# EAGLE board barbuddy_SIngle (EAGLE 7.7.0)
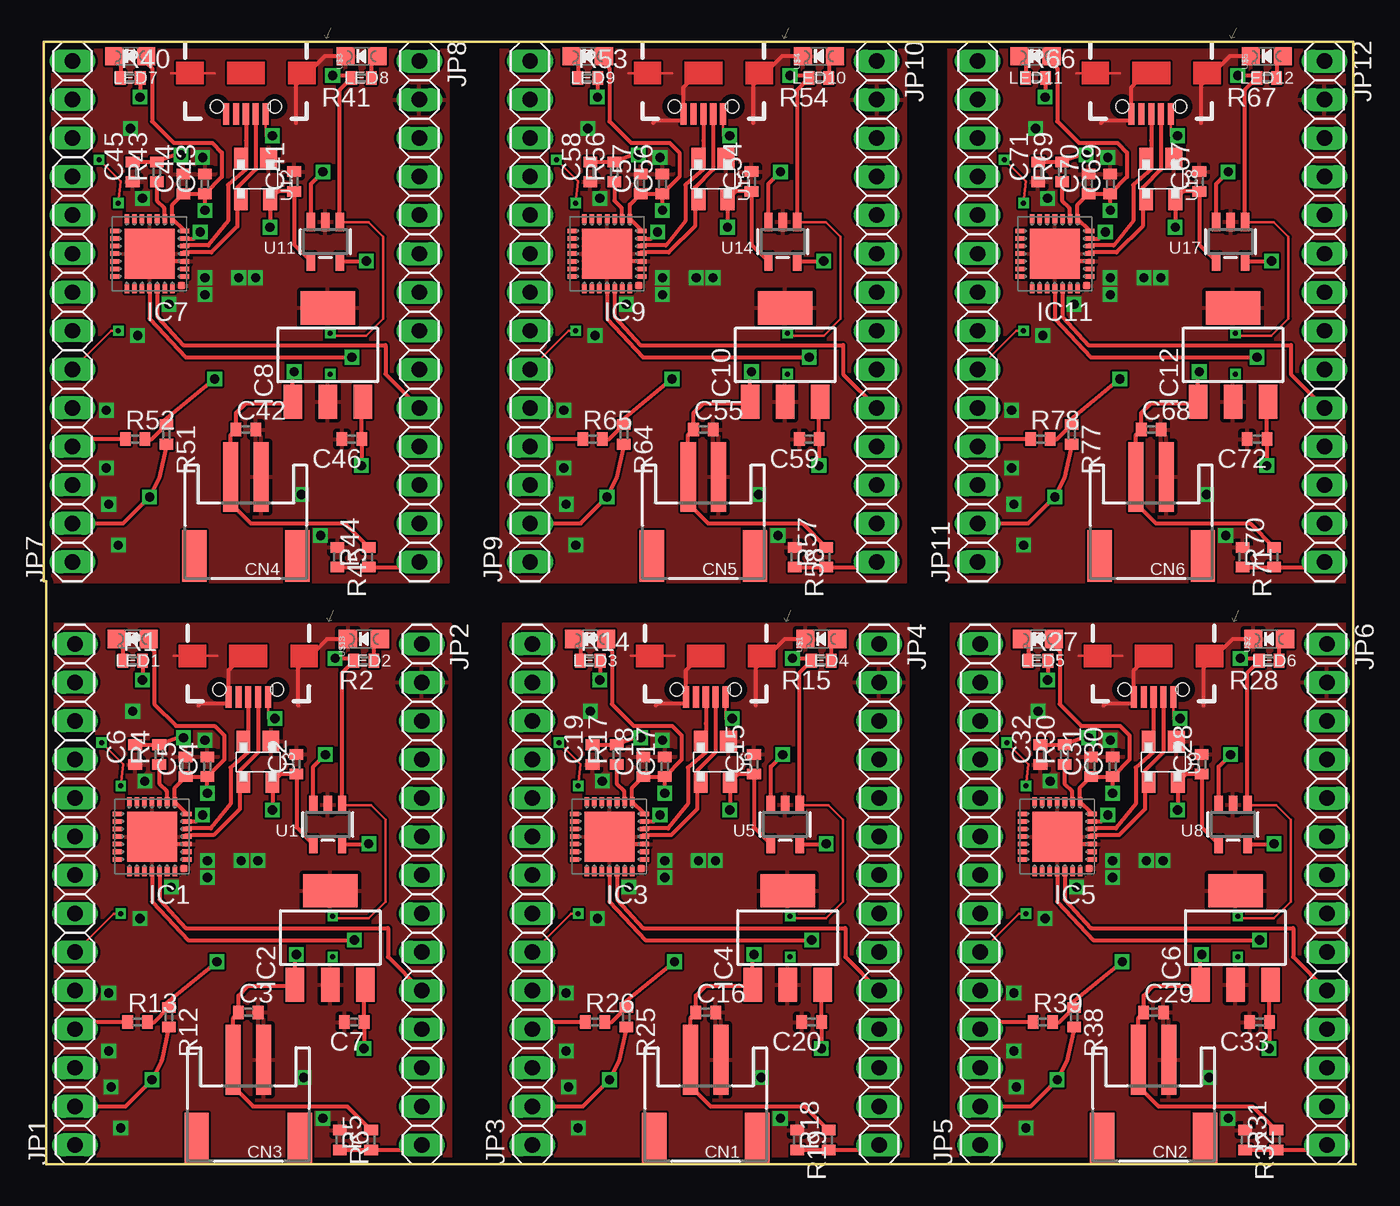
[diagram p0: board, top side]
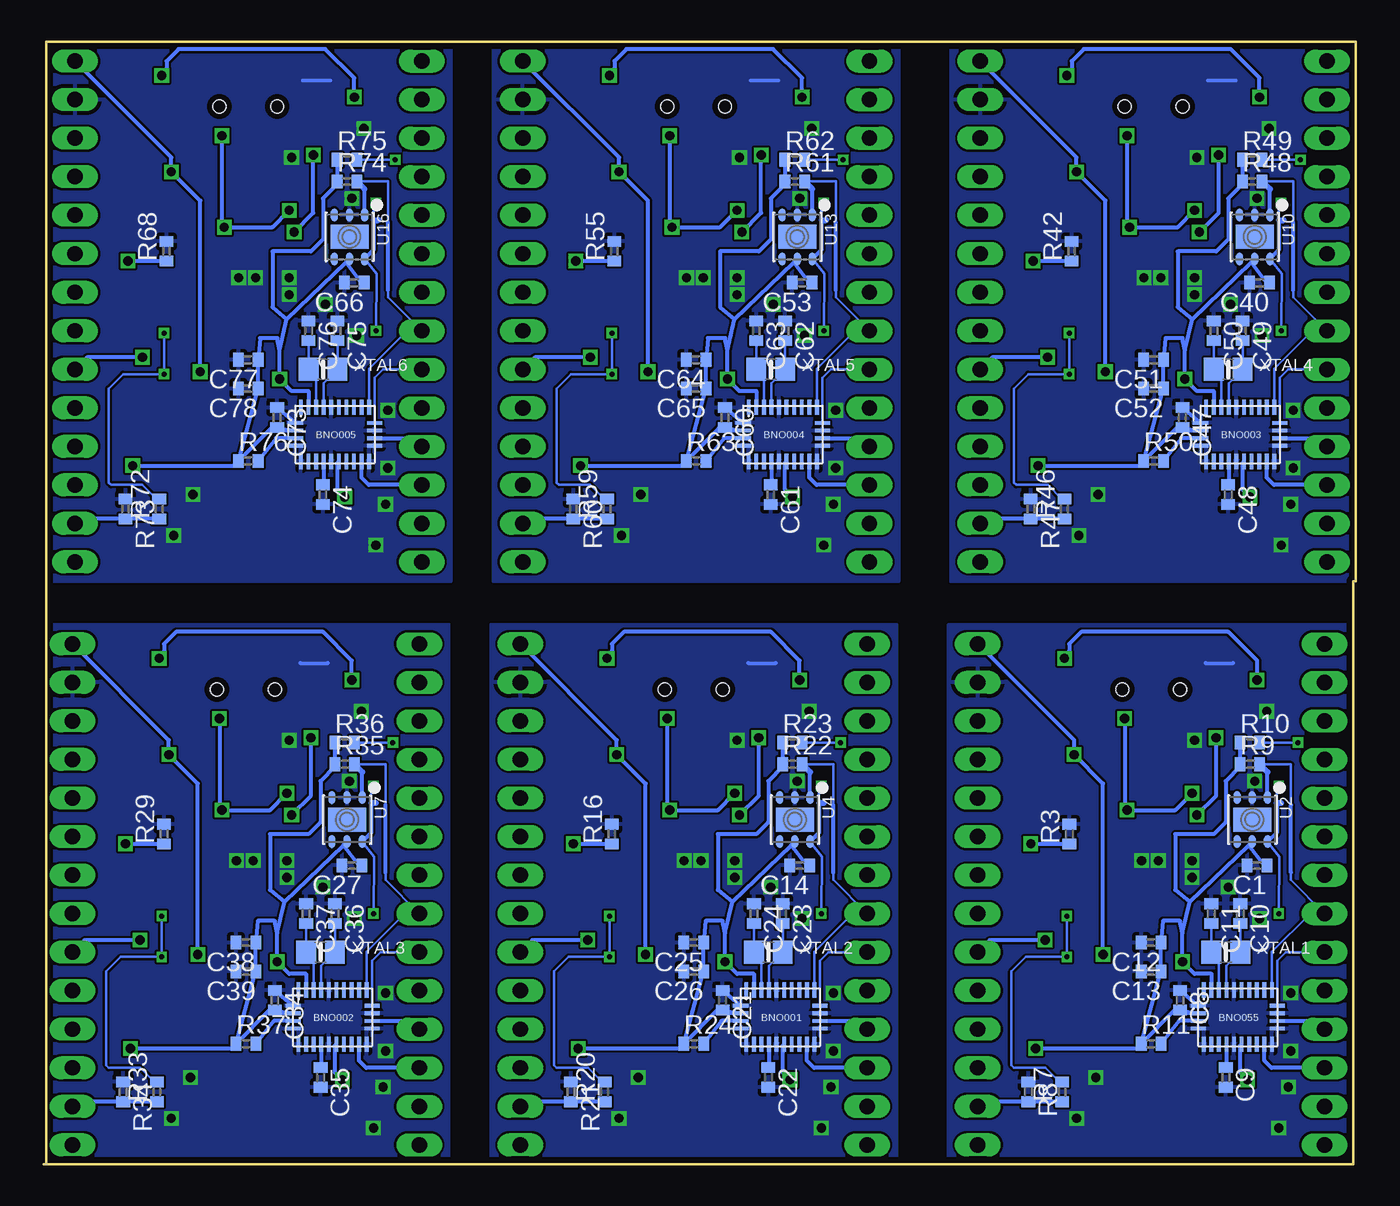
[diagram p1: board, bottom side, seen from below]

Size 86.52 x 73.98 mm. Coordinates in mm from the lower left corner, seen from the top.
Outline: 86.36,0 0.16,0 0.16,38.42 0,38.42 0,73.98 86.36,73.98 86.36,0
Outline: 86.52,0 86.36,0
Copper layers (1*16): Top 0.0356mm / dielectric 1.5011mm / Bottom 0.0356mm
Design rules "LaenPCBOrder": minimum track width 6mil, minimum drill 13mil, track to track 6mil, track to pad 6mil, pad to pad 6mil, via to via 6mil, smd to smd 6mil, copper to edge 15mil, drill to drill 6mil, minimum pad ring 7mil, minimum via ring 7mil, stop-mask expansion 3mil, vias tented up to drill 0mil, thermal gap 10mil

## Footprints (pad centres in the part's own frame; a part is rotated, then mirrored left to right if it is on the bottom)
LGA-28 = smd 0.25 x 1: P$1 -2.25,1.787; P$6 -2.25,-1.787; P$7 -1.75,-1.787; P$8 -1.25,-1.787; P$9 -0.75,-1.787; P$10 -0.25,-1.787; P$11 0.25,-1.787; P$12 0.75,-1.787; P$13 1.25,-1.787; P$14 1.75,-1.787; P$15 2.25,-1.787; P$20 2.25,1.787; P$21 1.75,1.787; P$22 1.25,1.787; P$23 0.75,1.787; P$24 0.25,1.787; P$25 -0.25,1.787; P$26 -0.75,1.787; P$27 -1.25,1.787; P$28 -1.75,1.787 | smd 1 x 0.25: P$2 -2.612,0.75; P$3 -2.612,0.25; P$4 -2.612,-0.25; P$5 -2.612,-0.75; P$16 2.612,-0.75; P$17 2.612,-0.25; P$18 2.612,0.25; P$19 2.612,0.75
C0402 = smd 0.7 x 0.9: 1 -0.65,0; 2 0.65,0
JSTPH2 = smd 1 x 4.6: 1 -1,-3.7; 2 1,-3.7 | smd 1.6 x 3.4: NC1 -3.4,1.5; NC2 3.4,1.5
MLP28 = smd 0.6 x 0.3: 1 -2.3,1.5; 2 -2.3,1; 3 -2.3,0.5; 4 -2.3,0; 5 -2.3,-0.5; 6 -2.3,-1; 7 -2.3,-1.5; 15 2.3,-1.5; 16 2.3,-1; 17 2.3,-0.5; 18 2.3,0; 19 2.3,0.5; 20 2.3,1; 21 2.3,1.5 | smd 0.3 x 0.6: 8 -1.5,-2.3; 9 -1,-2.3; 10 -0.5,-2.3; 11 0,-2.3; 12 0.5,-2.3; 13 1,-2.3; 14 1.5,-2.3; 22 1.5,2.3; 23 1,2.3; 24 0.5,2.3; 25 0,2.3; 26 -0.5,2.3; 27 -1,2.3; 28 -1.5,2.3 | smd 3.3 x 3.3: EXP 0,0 | smd 0.435 x 0.435: M -2.103,2.103
SOT223 = smd 1.219 x 2.235: 1 -2.311,-3.099; 2 0,-3.099; 3 2.311,-3.099 | smd 3.6 x 2.2: 4 0,3.099
1X14 = drill 1.016 long: 1 -16.51,0; 2 -13.97,0; 3 -11.43,0; 4 -8.89,0; 5 -6.35,0; 6 -3.81,0; 7 -1.27,0; 8 1.27,0; 9 3.81,0; 10 6.35,0; 11 8.89,0; 12 11.43,0; 13 13.97,0; 14 16.51,0
CHIPLED_0805_NOOUTLINE = smd 1.2 x 1.2: A 0,-1.05; C 0,1.05
R0402 = smd 0.7 x 0.9: 1 -0.65,0; 2 0.65,0
SOT23-5 = smd 0.55 x 1.2: 1 -0.95,-1.3; 2 0,-1.3; 3 0.95,-1.3; 4 0.95,1.3; 5 -0.95,1.3
DFN6_3X3_SI = smd 0.85 x 0.45: 1 -1.45,1; 2 -1.45,0; 3 -1.45,-1; 4 1.45,-1; 5 1.45,0; 6 1.45,1 | smd 1.6 x 2.5: P$1 0,0
SOT143 = smd 1.4 x 1.1: 1 -1.35,0.86 | smd 1.4 x 0.9: 2 -1.35,-0.96; 3 1.35,-0.96; 4 1.35,0.96
USB-AB-MICRO-SMD_V02_BOSS = smd 1.4 x 0.4: D+1 2.7,0; D-1 2.7,0.65; GND1 2.7,-1.3; ID1 2.7,-0.65; VBUS1 2.7,1.3 | hole 0.85: 2.2,1.9; 2.2,-1.9
0805-NO = smd 1.3 x 1.5: 1 -0.95,0; 2 0.95,0

## Placement (x,y rotation side)
BNO001  BNO055  [LGA-28]  37.94,9.68 0 bottom
BNO002  BNO055  [LGA-28]  67.47,9.68 0 bottom
BNO003  BNO055  [LGA-28]  7.62,48.1 0 bottom
BNO004  BNO055  [LGA-28]  37.78,48.1 0 bottom
BNO005  BNO055  [LGA-28]  67.31,48.1 0 bottom
BNO055  BNO055  [LGA-28]  7.78,9.68 0 bottom
C1  0.1uF  [C0402]  6.51,19.68 180 bottom
C2  10µF  [C0402]  16.67,26.35 90 top
C3  10µF  [C0402]  13.49,10 0 top
C4  1µF  [C0402]  10.79,26.19 90 top
C5  .1µF  [C0402]  9.37,26.19 90 top
C6  .1µF  [C0402]  6.03,26.99 90 top
C7  3.3uf  [C0402]  20.48,9.37 180 top
C8  0.1uF  [C0402]  11.59,10.79 270 bottom
C9  0.1uF  [C0402]  8.57,5.71 270 bottom
C10  22pf  [C0402]  7.62,16.51 270 bottom
C11  22pf  [C0402]  9.53,16.51 270 bottom
C12  6.8nf  [C0402]  13.49,14.61 180 bottom
C13  120nf  [C0402]  13.49,12.7 180 bottom
C14  0.1uF  [C0402]  36.67,19.68 180 bottom
C15  10µF  [C0402]  46.83,26.35 90 top
C16  10µF  [C0402]  43.66,10 0 top
C17  1µF  [C0402]  40.96,26.19 90 top
C18  .1µF  [C0402]  39.53,26.19 90 top
C19  .1µF  [C0402]  36.2,26.99 90 top
C20  3.3uf  [C0402]  50.64,9.37 180 top
C21  0.1uF  [C0402]  41.75,10.79 270 bottom
C22  0.1uF  [C0402]  38.73,5.71 270 bottom
C23  22pf  [C0402]  37.78,16.51 270 bottom
C24  22pf  [C0402]  39.69,16.51 270 bottom
C25  6.8nf  [C0402]  43.66,14.61 180 bottom
C26  120nf  [C0402]  43.66,12.7 180 bottom
C27  0.1uF  [C0402]  66.2,19.68 180 bottom
C28  10µF  [C0402]  76.36,26.35 90 top
C29  10µF  [C0402]  73.18,10 0 top
C30  1µF  [C0402]  70.48,26.19 90 top
C31  .1µF  [C0402]  69.06,26.19 90 top
C32  .1µF  [C0402]  65.72,26.99 90 top
C33  3.3uf  [C0402]  80.17,9.37 180 top
C34  0.1uF  [C0402]  71.28,10.79 270 bottom
C35  0.1uF  [C0402]  68.26,5.71 270 bottom
C36  22pf  [C0402]  67.31,16.51 270 bottom
C37  22pf  [C0402]  69.22,16.51 270 bottom
C38  6.8nf  [C0402]  73.18,14.61 180 bottom
C39  120nf  [C0402]  73.18,12.7 180 bottom
C40  0.1uF  [C0402]  6.35,58.1 180 bottom
C41  10µF  [C0402]  16.51,64.77 90 top
C42  10µF  [C0402]  13.33,48.42 0 top
C43  1µF  [C0402]  10.64,64.61 90 top
C44  .1µF  [C0402]  9.21,64.61 90 top
C45  .1µF  [C0402]  5.87,65.41 90 top
C46  3.3uf  [C0402]  20.32,47.78 180 top
C47  0.1uF  [C0402]  11.43,49.21 270 bottom
C48  0.1uF  [C0402]  8.41,44.13 270 bottom
C49  22pf  [C0402]  7.46,54.93 270 bottom
C50  22pf  [C0402]  9.37,54.93 270 bottom
C51  6.8nf  [C0402]  13.33,53.02 180 bottom
C52  120nf  [C0402]  13.33,51.12 180 bottom
C53  0.1uF  [C0402]  36.51,58.1 180 bottom
C54  10µF  [C0402]  46.67,64.77 90 top
C55  10µF  [C0402]  43.5,48.42 0 top
C56  1µF  [C0402]  40.8,64.61 90 top
C57  .1µF  [C0402]  39.37,64.61 90 top
C58  .1µF  [C0402]  36.04,65.41 90 top
C59  3.3uf  [C0402]  50.48,47.78 180 top
C60  0.1uF  [C0402]  41.59,49.21 270 bottom
C61  0.1uF  [C0402]  38.58,44.13 270 bottom
C62  22pf  [C0402]  37.62,54.93 270 bottom
C63  22pf  [C0402]  39.53,54.93 270 bottom
C64  6.8nf  [C0402]  43.5,53.02 180 bottom
C65  120nf  [C0402]  43.5,51.12 180 bottom
C66  0.1uF  [C0402]  66.04,58.1 180 bottom
C67  10µF  [C0402]  76.2,64.77 90 top
C68  10µF  [C0402]  73.02,48.42 0 top
C69  1µF  [C0402]  70.33,64.61 90 top
C70  .1µF  [C0402]  68.9,64.61 90 top
C71  .1µF  [C0402]  65.56,65.41 90 top
C72  3.3uf  [C0402]  80.01,47.78 180 top
C73  0.1uF  [C0402]  71.12,49.21 270 bottom
C74  0.1uF  [C0402]  68.1,44.13 270 bottom
C75  22pf  [C0402]  67.15,54.93 270 bottom
C76  22pf  [C0402]  69.06,54.93 270 bottom
C77  6.8nf  [C0402]  73.02,53.02 180 bottom
C78  120nf  [C0402]  73.02,51.12 180 bottom
CN1  JSTPH  [JSTPH2]  43.66,3.17 180 top
CN2  JSTPH  [JSTPH2]  73.18,3.17 180 top
CN3  JSTPH  [JSTPH2]  13.49,3.17 180 top
CN4  JSTPH  [JSTPH2]  13.33,41.59 180 top
CN5  JSTPH  [JSTPH2]  43.5,41.59 180 top
CN6  JSTPH  [JSTPH2]  73.02,41.59 180 top
IC1  CP2102  [MLP28]  7.14,21.59 180 top
IC2  [SOT223]  18.89,14.92 0 top
IC3  CP2102  [MLP28]  37.31,21.59 180 top
IC4  [SOT223]  49.05,14.92 0 top
IC5  CP2102  [MLP28]  66.83,21.59 180 top
IC6  [SOT223]  78.58,14.92 0 top
IC7  CP2102  [MLP28]  6.99,60.01 180 top
IC8  [SOT223]  18.73,53.34 0 top
IC9  CP2102  [MLP28]  37.15,60.01 180 top
IC10  [SOT223]  48.89,53.34 0 top
IC11  CP2102  [MLP28]  66.67,60.01 180 top
IC12  [SOT223]  78.42,53.34 0 top
JP1  [1X14]  2.06,17.78 90 top
JP2  [1X14]  24.92,17.78 270 top
JP3  [1X14]  32.23,17.78 90 top
JP4  [1X14]  55.09,17.78 270 top
JP5  [1X14]  61.75,17.78 90 top
JP6  [1X14]  84.61,17.78 270 top
JP7  [1X14]  1.91,56.2 90 top
JP8  [1X14]  24.77,56.2 270 top
JP9  [1X14]  32.07,56.2 90 top
JP10  [1X14]  54.93,56.2 270 top
JP11  [1X14]  61.59,56.2 90 top
JP12  [1X14]  84.45,56.2 270 top
LED1  RED  [CHIPLED_0805_NOOUTLINE]  5.87,34.61 90 top
LED2  GREEN  [CHIPLED_0805_NOOUTLINE]  21.11,34.61 90 top
LED3  RED  [CHIPLED_0805_NOOUTLINE]  36.04,34.61 90 top
LED4  GREEN  [CHIPLED_0805_NOOUTLINE]  51.28,34.61 90 top
LED5  RED  [CHIPLED_0805_NOOUTLINE]  65.56,34.61 90 top
LED6  GREEN  [CHIPLED_0805_NOOUTLINE]  80.8,34.61 90 top
LED7  RED  [CHIPLED_0805_NOOUTLINE]  5.72,73.03 90 top
LED8  GREEN  [CHIPLED_0805_NOOUTLINE]  20.96,73.03 90 top
LED9  RED  [CHIPLED_0805_NOOUTLINE]  35.88,73.03 90 top
LED10  GREEN  [CHIPLED_0805_NOOUTLINE]  51.12,73.03 90 top
LED11  RED  [CHIPLED_0805_NOOUTLINE]  65.41,73.03 90 top
LED12  GREEN  [CHIPLED_0805_NOOUTLINE]  80.64,73.03 90 top
R1  470  [R0402]  5.87,33.18 0 top
R2  470  [R0402]  21.11,33.18 180 top
R3  5K\  [R0402]  18.89,21.75 90 bottom
R4  4.7k  [R0402]  7.62,26.99 90 top
R5  33k  [R0402]  21.59,1.59 90 top
R6  100k  [R0402]  19.53,1.59 270 top
R7  33k  [R0402]  19.37,4.76 90 bottom
R8  100k  [R0402]  21.59,4.76 270 bottom
R9  10k  [R0402]  6.99,26.35 0 bottom
R10  10k  [R0402]  6.99,27.78 0 bottom
R11  10k  [R0402]  13.49,7.94 0 bottom
R12  10k  [R0402]  8.25,9.68 270 top
R13  10k  [R0402]  6.19,9.37 0 top
R14  470  [R0402]  36.04,33.18 0 top
R15  470  [R0402]  51.28,33.18 180 top
R16  5K\  [R0402]  49.05,21.75 90 bottom
R17  4.7k  [R0402]  37.78,26.99 90 top
R18  33k  [R0402]  51.75,1.59 90 top
R19  100k  [R0402]  49.69,1.59 270 top
R20  33k  [R0402]  49.53,4.76 90 bottom
R21  100k  [R0402]  51.75,4.76 270 bottom
R22  10k  [R0402]  37.15,26.35 0 bottom
R23  10k  [R0402]  37.15,27.78 0 bottom
R24  10k  [R0402]  43.66,7.94 0 bottom
R25  10k  [R0402]  38.42,9.68 270 top
R26  10k  [R0402]  36.35,9.37 0 top
R27  470  [R0402]  65.56,33.18 0 top
R28  470  [R0402]  80.8,33.18 180 top
R29  5K\  [R0402]  78.58,21.75 90 bottom
R30  4.7k  [R0402]  67.31,26.99 90 top
R31  33k  [R0402]  81.28,1.59 90 top
R32  100k  [R0402]  79.22,1.59 270 top
R33  33k  [R0402]  79.06,4.76 90 bottom
R34  100k  [R0402]  81.28,4.76 270 bottom
R35  10k  [R0402]  66.67,26.35 0 bottom
R36  10k  [R0402]  66.67,27.78 0 bottom
R37  10k  [R0402]  73.18,7.94 0 bottom
R38  10k  [R0402]  67.94,9.68 270 top
R39  10k  [R0402]  65.88,9.37 0 top
R40  470  [R0402]  5.72,71.6 0 top
R41  470  [R0402]  20.96,71.6 180 top
R42  5K\  [R0402]  18.73,60.17 90 bottom
R43  4.7k  [R0402]  7.46,65.41 90 top
R44  33k  [R0402]  21.43,40.01 90 top
R45  100k  [R0402]  19.37,40.01 270 top
R46  33k  [R0402]  19.21,43.18 90 bottom
R47  100k  [R0402]  21.43,43.18 270 bottom
R48  10k  [R0402]  6.83,64.77 0 bottom
R49  10k  [R0402]  6.83,66.2 0 bottom
R50  10k  [R0402]  13.33,46.35 0 bottom
R51  10k  [R0402]  8.1,48.1 270 top
R52  10k  [R0402]  6.03,47.78 0 top
R53  470  [R0402]  35.88,71.6 0 top
R54  470  [R0402]  51.12,71.6 180 top
R55  5K\  [R0402]  48.89,60.17 90 bottom
R56  4.7k  [R0402]  37.62,65.41 90 top
R57  33k  [R0402]  51.59,40.01 90 top
R58  100k  [R0402]  49.53,40.01 270 top
R59  33k  [R0402]  49.37,43.18 90 bottom
R60  100k  [R0402]  51.59,43.18 270 bottom
R61  10k  [R0402]  36.99,64.77 0 bottom
R62  10k  [R0402]  36.99,66.2 0 bottom
R63  10k  [R0402]  43.5,46.35 0 bottom
R64  10k  [R0402]  38.26,48.1 270 top
R65  10k  [R0402]  36.2,47.78 0 top
R66  470  [R0402]  65.41,71.6 0 top
R67  470  [R0402]  80.64,71.6 180 top
R68  5K\  [R0402]  78.42,60.17 90 bottom
R69  4.7k  [R0402]  67.15,65.41 90 top
R70  33k  [R0402]  81.12,40.01 90 top
R71  100k  [R0402]  79.06,40.01 270 top
R72  33k  [R0402]  78.9,43.18 90 bottom
R73  100k  [R0402]  81.12,43.18 270 bottom
R74  10k  [R0402]  66.52,64.77 0 bottom
R75  10k  [R0402]  66.52,66.2 0 bottom
R76  10k  [R0402]  73.02,46.35 0 bottom
R77  10k  [R0402]  67.79,48.1 270 top
R78  10k  [R0402]  65.72,47.78 0 top
U1  MCP73831T-2ACI/OT  [SOT23-5]  18.73,22.38 180 top
U2  Si7021-A20  [DFN6_3X3_SI]  6.83,22.7 270 bottom
U3  SP0503BAHTG  [SOT143]  14.13,26.51 270 top
U4  Si7021-A20  [DFN6_3X3_SI]  36.99,22.7 270 bottom
U5  MCP73831T-2ACI/OT  [SOT23-5]  48.89,22.38 180 top
U6  SP0503BAHTG  [SOT143]  44.29,26.51 270 top
U7  Si7021-A20  [DFN6_3X3_SI]  66.52,22.7 270 bottom
U8  MCP73831T-2ACI/OT  [SOT23-5]  78.42,22.38 180 top
U9  SP0503BAHTG  [SOT143]  73.82,26.51 270 top
U10  Si7021-A20  [DFN6_3X3_SI]  6.67,61.12 270 bottom
U11  MCP73831T-2ACI/OT  [SOT23-5]  18.57,60.8 180 top
U12  SP0503BAHTG  [SOT143]  13.97,64.93 270 top
U13  Si7021-A20  [DFN6_3X3_SI]  36.83,61.12 270 bottom
U14  MCP73831T-2ACI/OT  [SOT23-5]  48.74,60.8 180 top
U15  SP0503BAHTG  [SOT143]  44.13,64.93 270 top
U16  Si7021-A20  [DFN6_3X3_SI]  66.36,61.12 270 bottom
U17  MCP73831T-2ACI/OT  [SOT23-5]  78.26,60.8 180 top
U18  SP0503BAHTG  [SOT143]  73.66,64.93 270 top
U$1  [USB-AB-MICRO-SMD_V02_BOSS]  43.66,33.5 270 top
U$2  [USB-AB-MICRO-SMD_V02_BOSS]  73.18,33.5 270 top
U$3  [USB-AB-MICRO-SMD_V02_BOSS]  13.33,71.91 270 top
U$4  [USB-AB-MICRO-SMD_V02_BOSS]  43.5,71.91 270 top
U$5  [USB-AB-MICRO-SMD_V02_BOSS]  73.02,71.91 270 top
U$13  [USB-AB-MICRO-SMD_V02_BOSS]  13.49,33.5 270 top
XTAL1  10k  [0805-NO]  8.57,13.97 0 bottom
XTAL2  10k  [0805-NO]  38.73,13.97 0 bottom
XTAL3  10k  [0805-NO]  68.26,13.97 0 bottom
XTAL4  10k  [0805-NO]  8.41,52.39 0 bottom
XTAL5  10k  [0805-NO]  38.58,52.39 0 bottom
XTAL6  10k  [0805-NO]  68.1,52.39 0 bottom

## Library data of the parts
BNO001-BNO005 BNO055 = BNO055
C1-C78 R1-R78 = rcl
CN1-CN6 LED1-LED12 U1 U2 U4 U5 U7 U8 U10 U11 U13 U14 U16 U17 XTAL1-XTAL6 = microbuilder
IC1 IC3 IC5 IC7 IC9 IC11 = silabs; MF: FARNELL; MPN: CP2102-GM; OC_FARNELL: 9282130; OC_NEWARK: 30K5635
IC2 IC4 IC6 IC8 IC10 IC12 = linear-technology
JP1-JP12 = pinhead
U3 U6 U9 U12 U15 U18 = littlefuse
U$1-U$5 U$13 = Testing

## Nets
BATT_SENSE: JP2.14 R5.1 R6.2
BATT_SENSE1: JP4.14 R18.1 R19.2
BATT_SENSE2: JP6.14 R31.1 R32.2
BATT_SENSE3: JP8.14 R44.1 R45.2
BATT_SENSE4: JP10.14 R57.1 R58.2
BATT_SENSE5: JP12.14 R70.1 R71.2
BNO_CAP: BNO055.P$9 C9.1
BNO_CAP1: BNO001.P$9 C22.1
BNO_CAP2: BNO002.P$9 C35.1
BNO_CAP3: BNO003.P$9 C48.1
BNO_CAP4: BNO004.P$9 C61.1
BNO_CAP5: BNO005.P$9 C74.1
BNO_INT: BNO055.P$14 JP1.3
BNO_INT1: BNO001.P$14 JP3.3
BNO_INT2: BNO002.P$14 JP5.3
BNO_INT3: BNO003.P$14 JP7.3
BNO_INT4: BNO004.P$14 JP9.3
BNO_INT5: BNO005.P$14 JP11.3
BNO_RST: BNO055.P$11 JP1.2 R12.2
BNO_RST1: BNO001.P$11 JP3.2 R25.2
BNO_RST2: BNO002.P$11 JP5.2 R38.2
BNO_RST3: BNO003.P$11 JP7.2 R51.2
BNO_RST4: BNO004.P$11 JP9.2 R64.2
BNO_RST5: BNO005.P$11 JP11.2 R77.2
CHG_PROG: R3.1 U1.5
CHG_PROG1: R16.1 U5.5
CHG_PROG2: R29.1 U8.5
CHG_PROG3: R42.1 U11.5
CHG_PROG4: R55.1 U14.5
CHG_PROG5: R68.1 U17.5
CHG_SENSE: JP2.13 R7.1 R8.2
CHG_SENSE1: JP4.13 R20.1 R21.2
CHG_SENSE2: JP6.13 R33.1 R34.2
CHG_SENSE3: JP8.13 R46.1 R47.2
CHG_SENSE4: JP10.13 R59.1 R60.2
CHG_SENSE5: JP12.13 R72.1 R73.2
CHG_STATUS: R1.2 R2.2 R7.2 U1.1
CHG_STATUS1: R14.2 R15.2 R20.2 U5.1
CHG_STATUS2: R27.2 R28.2 R33.2 U8.1
CHG_STATUS3: R40.2 R41.2 R46.2 U11.1
CHG_STATUS4: R53.2 R54.2 R59.2 U14.1
CHG_STATUS5: R66.2 R67.2 R72.2 U17.1
CP2102_RST: IC1.9 R4.1
CP2102_RST1: IC3.9 R17.1
CP2102_RST2: IC5.9 R30.1
CP2102_RST3: IC7.9 R43.1
CP2102_RST4: IC9.9 R56.1
CP2102_RST5: IC11.9 R69.1
D+: U$13.D+1
D+1: U$1.D+1
D+2: U$2.D+1
D+3: U$3.D+1
D+4: U$4.D+1
D+5: U$5.D+1
D-: U$13.D-1
D-1: U$1.D-1
D-2: U$2.D-1
D-3: U$3.D-1
D-4: U$4.D-1
D-5: U$5.D-1
GND: BNO055.P$2 BNO055.P$5 BNO055.P$6 BNO055.P$10 BNO055.P$15 BNO055.P$16 BNO055.P$18 BNO055.P$25 C1.2 C2.2 C3.2 C4.2 C5.2 C6.1 C7.2 C8.1 C9.2 C10.1 C11.1 C12.2 C13.2 CN3.1 IC1.3 IC1.EXP IC1.M IC2.2 IC2.4 JP2.2 LED2.C R3.2 R6.1 R8.1 U1.2 U2.2 U3.1
GND1: U$13.GND1
GND2: BNO001.P$2 BNO001.P$5 BNO001.P$6 BNO001.P$10 BNO001.P$15 BNO001.P$16 BNO001.P$18 BNO001.P$25 C14.2 C15.2 C16.2 C17.2 C18.2 C19.1 C20.2 C21.1 C22.2 C23.1 C24.1 C25.2 C26.2 CN1.1 IC3.3 IC3.EXP IC3.M IC4.2 IC4.4 JP4.2 LED4.C R16.2 R19.1 R21.1 U4.2 U5.2 U6.1
GND3: U$1.GND1
GND4: BNO002.P$2 BNO002.P$5 BNO002.P$6 BNO002.P$10 BNO002.P$15 BNO002.P$16 BNO002.P$18 BNO002.P$25 C27.2 C28.2 C29.2 C30.2 C31.2 C32.1 C33.2 C34.1 C35.2 C36.1 C37.1 C38.2 C39.2 CN2.1 IC5.3 IC5.EXP IC5.M IC6.2 IC6.4 JP6.2 LED6.C R29.2 R32.1 R34.1 U7.2 U8.2 U9.1
GND5: U$2.GND1
GND6: BNO003.P$2 BNO003.P$5 BNO003.P$6 BNO003.P$10 BNO003.P$15 BNO003.P$16 BNO003.P$18 BNO003.P$25 C40.2 C41.2 C42.2 C43.2 C44.2 C45.1 C46.2 C47.1 C48.2 C49.1 C50.1 C51.2 C52.2 CN4.1 IC7.3 IC7.EXP IC7.M IC8.2 IC8.4 JP8.2 LED8.C R42.2 R45.1 R47.1 U10.2 U11.2 U12.1
GND7: U$3.GND1
GND8: BNO004.P$2 BNO004.P$5 BNO004.P$6 BNO004.P$10 BNO004.P$15 BNO004.P$16 BNO004.P$18 BNO004.P$25 C53.2 C54.2 C55.2 C56.2 C57.2 C58.1 C59.2 C60.1 C61.2 C62.1 C63.1 C64.2 C65.2 CN5.1 IC9.3 IC9.EXP IC9.M IC10.2 IC10.4 JP10.2 LED10.C R55.2 R58.1 R60.1 U13.2 U14.2 U15.1
GND9: U$4.GND1
GND10: BNO005.P$2 BNO005.P$5 BNO005.P$6 BNO005.P$10 BNO005.P$15 BNO005.P$16 BNO005.P$18 BNO005.P$25 C66.2 C67.2 C68.2 C69.2 C70.2 C71.1 C72.2 C73.1 C74.2 C75.1 C76.1 C77.2 C78.2 CN6.1 IC11.3 IC11.EXP IC11.M IC12.2 IC12.4 JP12.2 LED12.C R68.2 R71.1 R73.1 U16.2 U17.2 U18.1
GND11: U$5.GND1
I2C_ADDR_SEL: BNO055.P$17 JP1.4 R13.1
I2C_ADDR_SEL1: BNO001.P$17 JP3.4 R26.1
I2C_ADDR_SEL2: BNO002.P$17 JP5.4 R39.1
I2C_ADDR_SEL3: BNO003.P$17 JP7.4 R52.1
I2C_ADDR_SEL4: BNO004.P$17 JP9.4 R65.1
I2C_ADDR_SEL5: BNO005.P$17 JP11.4 R78.1
I2C_SCL: BNO055.P$19 JP1.6 R10.2 U2.6
I2C_SCL1: BNO001.P$19 JP3.6 R23.2 U4.6
I2C_SCL2: BNO002.P$19 JP5.6 R36.2 U7.6
I2C_SCL3: BNO003.P$19 JP7.6 R49.2 U10.6
I2C_SCL4: BNO004.P$19 JP9.6 R62.2 U13.6
I2C_SCL5: BNO005.P$19 JP11.6 R75.2 U16.6
I2C_SDA: BNO055.P$20 JP1.7 R9.2 U2.1
I2C_SDA1: BNO001.P$20 JP3.7 R22.2 U4.1
I2C_SDA2: BNO002.P$20 JP5.7 R35.2 U7.1
I2C_SDA3: BNO003.P$20 JP7.7 R48.2 U10.1
I2C_SDA4: BNO004.P$20 JP9.7 R61.2 U13.1
I2C_SDA5: BNO005.P$20 JP11.7 R74.2 U16.1
ID: U$13.ID1
ID1: U$1.ID1
ID2: U$2.ID1
ID3: U$3.ID1
ID4: U$4.ID1
ID5: U$5.ID1
N$1: LED1.C R1.1
N$2: LED3.C R14.1
N$3: BNO055.P$4 R11.2
N$4: LED4.A R15.1
N$5: BNO001.P$4 R24.2
N$6: LED2.A R2.1
N$7: LED5.C R27.1
N$8: LED6.A R28.1
N$9: BNO002.P$4 R37.2
N$10: LED7.C R40.1
N$11: LED8.A R41.1
N$12: BNO003.P$4 R50.2
N$13: LED9.C R53.1
N$14: LED10.A R54.1
N$15: BNO004.P$4 R63.2
N$16: LED11.C R66.1
N$17: LED12.A R67.1
N$18: BNO005.P$4 R76.2
UART0_RX: IC1.26 JP2.10
UART0_RX1: IC3.26 JP4.10
UART0_RX2: IC5.26 JP6.10
UART0_RX3: IC7.26 JP8.10
UART0_RX4: IC9.26 JP10.10
UART0_RX5: IC11.26 JP12.10
UART0_TX: IC1.25 JP2.9
UART0_TX1: IC3.25 JP4.9
UART0_TX2: IC5.25 JP6.9
UART0_TX3: IC7.25 JP8.9
UART0_TX4: IC9.25 JP10.9
UART0_TX5: IC11.25 JP12.9
USB_N: IC1.4 U3.3
USB_N1: IC3.4 U6.3
USB_N2: IC5.4 U9.3
USB_N3: IC7.4 U12.3
USB_N4: IC9.4 U15.3
USB_N5: IC11.4 U18.3
USB_P: IC1.5 U3.2
USB_P1: IC3.5 U6.2
USB_P2: IC5.5 U9.2
USB_P3: IC7.5 U12.2
USB_P4: IC9.5 U15.2
USB_P5: IC11.5 U18.2
VBAT1: C3.1 CN3.2 IC2.1 JP2.1 R5.2 U1.3
VBAT2: C16.1 CN1.2 IC4.1 JP4.1 R18.2 U5.3
VBAT3: C29.1 CN2.2 IC6.1 JP6.1 R31.2 U8.3
VBAT4: C42.1 CN4.2 IC8.1 JP8.1 R44.2 U11.3
VBAT5: C55.1 CN5.2 IC10.1 JP10.1 R57.2 U14.3
VBAT6: C68.1 CN6.2 IC12.1 JP12.1 R70.2 U17.3
VDD_3V1: BNO001.P$3 BNO001.P$28 C14.1 C20.1 C21.2 C25.1 C26.1 IC4.3 R22.1 R23.1 R24.1 R25.1 R26.2 U4.5
VDD_3V2: BNO002.P$3 BNO002.P$28 C27.1 C33.1 C34.2 C38.1 C39.1 IC6.3 R35.1 R36.1 R37.1 R38.1 R39.2 U7.5
VDD_3V3: BNO055.P$3 BNO055.P$28 C1.1 C7.1 C8.2 C12.1 C13.1 IC2.3 R9.1 R10.1 R11.1 R12.1 R13.2 U2.5
VDD_3V4: BNO003.P$3 BNO003.P$28 C40.1 C46.1 C47.2 C51.1 C52.1 IC8.3 R48.1 R49.1 R50.1 R51.1 R52.2 U10.5
VDD_3V5: BNO004.P$3 BNO004.P$28 C53.1 C59.1 C60.2 C64.1 C65.1 IC10.3 R61.1 R62.1 R63.1 R64.1 R65.2 U13.5
VDD_3V6: BNO005.P$3 BNO005.P$28 C66.1 C72.1 C73.2 C77.1 C78.1 IC12.3 R74.1 R75.1 R76.1 R77.1 R78.2 U16.5
VDD_CP1: C19.2 IC3.6 R17.2
VDD_CP2: C32.2 IC5.6 R30.2
VDD_CP3: C45.2 IC7.6 R43.2
VDD_CP4: C58.2 IC9.6 R56.2
VDD_CP5: C71.2 IC11.6 R69.2
VDD_CP2102: C6.2 IC1.6 R4.2
VDD_USB: C2.1 C4.1 C5.1 IC1.7 IC1.8 LED1.A U1.4 U3.4 U$13.VBUS1
VDD_USB1: C15.1 C17.1 C18.1 IC3.7 IC3.8 LED3.A U5.4 U6.4 U$1.VBUS1
VDD_USB2: C28.1 C30.1 C31.1 IC5.7 IC5.8 LED5.A U8.4 U9.4 U$2.VBUS1
VDD_USB3: C41.1 C43.1 C44.1 IC7.7 IC7.8 LED7.A U11.4 U12.4 U$3.VBUS1
VDD_USB4: C54.1 C56.1 C57.1 IC9.7 IC9.8 LED9.A U14.4 U15.4 U$4.VBUS1
VDD_USB5: C67.1 C69.1 C70.1 IC11.7 IC11.8 LED11.A U17.4 U18.4 U$5.VBUS1
X_IN: BNO055.P$27 C11.2 XTAL1.1
X_IN1: BNO001.P$27 C24.2 XTAL2.1
X_IN2: BNO002.P$27 C37.2 XTAL3.1
X_IN3: BNO003.P$27 C50.2 XTAL4.1
X_IN4: BNO004.P$27 C63.2 XTAL5.1
X_IN5: BNO005.P$27 C76.2 XTAL6.1
X_OUT: BNO055.P$26 C10.2 XTAL1.2
X_OUT1: BNO001.P$26 C23.2 XTAL2.2
X_OUT2: BNO002.P$26 C36.2 XTAL3.2
X_OUT3: BNO003.P$26 C49.2 XTAL4.2
X_OUT4: BNO004.P$26 C62.2 XTAL5.2
X_OUT5: BNO005.P$26 C75.2 XTAL6.2

## Tracks (layer width: path | path; a pad name or v marks a point on that pad's centre or on a via)
BATT_SENSE
  Top 0.254: R6.2 R5.1 24.59,0.94 JP2.14
BATT_SENSE1
  Top 0.254: R19.2 R18.1 54.75,0.94 JP4.14
BATT_SENSE2
  Top 0.254: R32.2 R31.1 84.28,0.94 JP6.14
BATT_SENSE3
  Top 0.254: R45.2 R44.1 24.43,39.35 JP8.14
BATT_SENSE4
  Top 0.254: R58.2 R57.1 54.59,39.35 JP10.14
BATT_SENSE5
  Top 0.254: R71.2 R70.1 84.12,39.35 JP12.14
BNO_CAP
  Bottom 0.254: BNO055.P$9 8.53,6.41 C9.1
BNO_CAP1
  Bottom 0.254: BNO001.P$9 38.69,6.41 C22.1
BNO_CAP2
  Bottom 0.254: BNO002.P$9 68.22,6.41 C35.1
BNO_CAP3
  Bottom 0.254: BNO003.P$9 8.37,44.83 C48.1
BNO_CAP4
  Bottom 0.254: BNO004.P$9 38.53,44.83 C61.1
BNO_CAP5
  Bottom 0.254: BNO005.P$9 68.06,44.83 C74.1
BNO_INT
  Bottom 0.254: JP1.3 5.56,6.35 6.03,6.83 BNO055.P$14
BNO_INT1
  Bottom 0.254: JP3.3 35.72,6.35 36.19,6.83 BNO001.P$14
BNO_INT2
  Bottom 0.254: JP5.3 65.25,6.35 65.72,6.83 BNO002.P$14
BNO_INT3
  Bottom 0.254: JP7.3 5.4,44.77 5.87,45.24 BNO003.P$14
BNO_INT4
  Bottom 0.254: JP9.3 35.56,44.77 36.04,45.24 BNO004.P$14
BNO_INT5
  Bottom 0.254: JP11.3 65.09,44.77 65.56,45.24 BNO005.P$14
BNO_RST  (via drill 0.61)
  Top 0.254: R12.2 7.78,6.83 v7.14,5.56 5.4,3.81 JP1.2
  Bottom 0.254: v7.14,5.56 7.62,6.03 7.62,7.81 BNO055.P$11
BNO_RST1  (via drill 0.61)
  Top 0.254: R25.2 37.94,6.83 v37.31,5.56 35.56,3.81 JP3.2
  Bottom 0.254: v37.31,5.56 37.78,6.03 37.78,7.81 BNO001.P$11
BNO_RST2  (via drill 0.61)
  Top 0.254: R38.2 67.47,6.83 v66.83,5.56 65.09,3.81 JP5.2
  Bottom 0.254: v66.83,5.56 67.31,6.03 67.31,7.81 BNO002.P$11
BNO_RST3  (via drill 0.61)
  Top 0.254: R51.2 7.62,45.24 v6.98,43.97 5.24,42.23 JP7.2
  Bottom 0.254: v6.98,43.97 7.46,44.45 7.46,46.22 BNO003.P$11
BNO_RST4  (via drill 0.61)
  Top 0.254: R64.2 37.78,45.24 v37.15,43.97 35.4,42.23 JP9.2
  Bottom 0.254: v37.15,43.97 37.62,44.45 37.62,46.22 BNO004.P$11
BNO_RST5  (via drill 0.61)
  Top 0.254: R77.2 67.31,45.24 v66.67,43.97 64.93,42.23 JP11.2
  Bottom 0.254: v66.67,43.97 67.15,44.45 67.15,46.22 BNO005.P$11
CHG_PROG  (via drill 0.61)
  Top 0.254: U1.5 21.4,21.08 v21.43,21.11
  Bottom 0.254: v21.43,21.11 18.91,21.11 R3.1
CHG_PROG1  (via drill 0.61)
  Top 0.254: U5.5 51.56,21.08 v51.59,21.11
  Bottom 0.254: v51.59,21.11 49.07,21.11 R16.1
CHG_PROG2  (via drill 0.61)
  Top 0.254: U8.5 81.09,21.08 v81.12,21.11
  Bottom 0.254: v81.12,21.11 78.6,21.11 R29.1
CHG_PROG3  (via drill 0.61)
  Top 0.254: U11.5 21.24,59.5 v21.27,59.53
  Bottom 0.254: v21.27,59.53 18.75,59.53 R42.1
CHG_PROG4  (via drill 0.61)
  Top 0.254: U14.5 51.4,59.5 v51.43,59.53
  Bottom 0.254: v51.43,59.53 R55.1
CHG_PROG5  (via drill 0.61)
  Top 0.254: U17.5 80.93,59.5 v80.96,59.53
  Bottom 0.254: v80.96,59.53 78.44,59.53 R68.1
CHG_SENSE
  Bottom 0.254: R7.1 R8.2 24.62,4.11 JP2.13
CHG_SENSE1
  Bottom 0.254: R20.1 R21.2 54.78,4.11 JP4.13
CHG_SENSE2
  Bottom 0.254: R33.1 R34.2 84.31,4.11 JP6.13
CHG_SENSE3
  Bottom 0.254: R46.1 R47.2 24.46,42.53 JP8.13
CHG_SENSE4
  Bottom 0.254: R59.1 R60.2 54.62,42.53 JP10.13
CHG_SENSE5
  Bottom 0.254: R72.1 R73.2 84.15,42.53 JP12.13
CHG_STATUS  (via drill 0.33, 0.61)
  Top 0.152: v19.05,16.35 18.89,16.19 21.43,16.19 22.54,17.3 22.54,22.7 21.59,23.65 19.71,23.65 U1.1
  Top 0.254: U1.1 19.68,32.4 R2.2 20.15,33.34 v19.21,33.34 | R1.2 6.52,31.92 v6.51,31.91
  Bottom 0.152: R7.2 19.54,5.41 20.48,6.35 22.54,6.35 22.7,6.51 22.7,12.7 21.75,13.65 v19.05,13.65 v19.05,16.35
  Bottom 0.254: v6.51,31.91 6.51,33.18 8.41,35.08 18.1,35.08 18.89,34.29 18.89,33.81 v19.21,33.34
CHG_STATUS1  (via drill 0.33, 0.61)
  Top 0.152: v49.21,16.35 49.05,16.19 51.59,16.19 52.7,17.3 52.7,22.7 51.75,23.65 49.87,23.65 U5.1
  Top 0.254: U5.1 49.84,32.4 R15.2 50.31,33.34 v49.37,33.34 | R14.2 36.69,31.92 v36.67,31.91
  Bottom 0.152: R20.2 49.7,5.41 50.64,6.35 52.7,6.35 52.86,6.51 52.86,12.7 51.91,13.65 v49.21,13.65 v49.21,16.35
  Bottom 0.254: v36.67,31.91 36.67,33.18 38.58,35.08 48.26,35.08 49.05,34.29 49.05,33.81 v49.37,33.34
CHG_STATUS2  (via drill 0.33, 0.61)
  Top 0.152: v78.74,16.35 78.58,16.19 81.12,16.19 82.23,17.3 82.23,22.7 81.28,23.65 79.4,23.65 U8.1
  Top 0.254: U8.1 79.37,32.4 R28.2 79.84,33.34 v78.9,33.34 | R27.2 66.21,31.92 v66.2,31.91
  Bottom 0.152: R33.2 79.23,5.41 80.17,6.35 82.23,6.35 82.39,6.51 82.39,12.7 81.44,13.65 v78.74,13.65 v78.74,16.35
  Bottom 0.254: v66.2,31.91 66.2,33.18 68.1,35.08 77.79,35.08 78.58,34.29 78.58,33.81 v78.9,33.34
CHG_STATUS3  (via drill 0.33, 0.61)
  Top 0.152: v18.89,54.77 18.73,54.61 21.27,54.61 22.38,55.72 22.38,61.12 21.43,62.07 19.55,62.07 U11.1
  Top 0.254: U11.1 19.52,70.81 R41.2 19.99,71.75 v19.05,71.75 | R40.2 6.36,70.34 v6.35,70.33
  Bottom 0.152: R46.2 19.38,43.83 20.32,44.77 22.38,44.77 22.54,44.93 22.54,51.12 21.59,52.07 v18.89,52.07 v18.89,54.77
  Bottom 0.254: v6.35,70.33 6.35,71.6 8.25,73.5 17.94,73.5 18.73,72.71 18.73,72.23 v19.05,71.75
CHG_STATUS4  (via drill 0.33, 0.61)
  Top 0.152: v49.05,54.77 48.89,54.61 51.43,54.61 52.55,55.72 52.55,61.12 51.59,62.07 49.72,62.07 U14.1
  Top 0.254: U14.1 49.69,70.81 R54.2 50.15,71.75 v49.21,71.75 | R53.2 36.53,70.34 v36.51,70.33
  Bottom 0.152: R59.2 49.54,43.83 50.48,44.77 52.55,44.77 52.7,44.93 52.7,51.12 51.75,52.07 v49.05,52.07 v49.05,54.77
  Bottom 0.254: v36.51,70.33 36.51,71.6 38.42,73.5 48.1,73.5 48.89,72.71 48.89,72.23 v49.21,71.75
CHG_STATUS5  (via drill 0.33, 0.61)
  Top 0.152: v78.58,54.77 78.42,54.61 80.96,54.61 82.07,55.72 82.07,61.12 81.12,62.07 79.24,62.07 U17.1
  Top 0.254: U17.1 79.21,70.81 R67.2 79.68,71.75 v78.74,71.75 | R66.2 66.05,70.34 v66.04,70.33
  Bottom 0.152: R72.2 79.07,43.83 80.01,44.77 82.07,44.77 82.23,44.93 82.23,51.12 81.28,52.07 v78.58,52.07 v78.58,54.77
  Bottom 0.254: v66.04,70.33 66.04,71.6 67.94,73.5 77.63,73.5 78.42,72.71 78.42,72.23 v78.74,71.75
CP2102_RST
  Top 0.254: R4.1 7.62,25.08 8.1,24.61 8.1,23.94 IC1.9
CP2102_RST1
  Top 0.254: R17.1 37.78,25.08 38.26,24.61 38.26,23.94 IC3.9
CP2102_RST2
  Top 0.254: R30.1 67.31,25.08 67.79,24.61 67.79,23.94 IC5.9
CP2102_RST3
  Top 0.254: R43.1 7.46,63.5 7.94,63.02 7.94,62.35 IC7.9
CP2102_RST4
  Top 0.254: R56.1 37.62,63.5 38.1,63.02 38.1,62.35 IC9.9
CP2102_RST5
  Top 0.254: R69.1 67.15,63.5 67.63,63.02 67.63,62.35 IC11.9
GND  (via drill 0.61)
  Top 0.152: 8.57,33.5 9.84,33.5 11.43,33.5
  Top 0.254: LED2.C 18.69,34.61 16.79,32.72 16.79,30.21 | 10.19,30.21 10.32,30.34 12.19,30.34 12.19,32.56 12.74,33.12 | IC1.EXP 8.1,21.59 8.57,21.11 9.42,21.11 IC1.3
  Bottom 0.254: BNO055.P$2 10.42,10.43 C8.1 | 9.89,33.02 8.1,33.02
  other vias: 18.42,3.02 17.14,5.71 5.87,29.84 13.02,20 14.13,20 8.41,18.26 6.35,16.19 4.29,11.27 5.08,2.38 4.29,7.46 4.45,5.08 10.64,27.94 10.79,20 10.79,18.89 6.67,25.24
  pour Bottom: 0.16,35.56 0.16,0 26.83,0 26.83,35.56
  pour Top: 0.16,35.56 0.16,0 26.83,0 26.83,35.56
GND2  (via drill 0.61)
  Top 0.152: 38.73,33.5 40,33.5 41.59,33.5
  Top 0.254: LED4.C 48.85,34.61 46.96,32.72 46.96,30.21 | 40.36,30.21 40.48,30.34 42.36,30.34 42.36,32.56 42.91,33.12 | IC3.EXP 38.26,21.59 38.73,21.11 39.58,21.11 IC3.3
  Bottom 0.254: BNO001.P$2 40.58,10.43 C21.1 | 40.06,33.02 38.26,33.02
  other vias: 48.58,3.02 47.31,5.71 36.04,29.84 43.18,20 44.29,20 38.58,18.26 36.51,16.19 34.45,11.27 35.24,2.38 34.45,7.46 34.61,5.08 40.8,27.94 40.96,20 40.96,18.89 36.83,25.24
  pour Bottom: 30.32,35.56 30.32,0 56.99,0 56.99,35.56
  pour Top: 30.32,35.56 30.32,0 56.99,0 56.99,35.56
GND4  (via drill 0.61)
  Top 0.152: 68.26,33.5 69.53,33.5 71.12,33.5
  Top 0.254: LED6.C 78.38,34.61 76.48,32.72 76.48,30.21 | 69.88,30.21 70.01,30.34 71.88,30.34 71.88,32.56 72.43,33.12 | IC5.EXP 67.79,21.59 68.26,21.11 69.11,21.11 IC5.3
  Bottom 0.254: BNO002.P$2 70.11,10.43 C34.1 | 69.58,33.02 67.79,33.02
  other vias: 78.11,3.02 76.83,5.71 65.56,29.84 72.71,20 73.82,20 68.1,18.26 66.04,16.19 63.98,11.27 64.77,2.38 63.98,7.46 64.14,5.08 70.33,27.94 70.48,20 70.48,18.89 66.36,25.24
  pour Bottom: 59.85,35.56 59.85,0 86.52,0 86.52,35.56
  pour Top: 59.85,35.56 59.85,0 86.52,0 86.52,35.56
GND6  (via drill 0.61)
  Top 0.152: 8.41,71.91 11.27,71.91
  Top 0.254: LED8.C 18.53,73.03 16.63,71.13 16.63,68.63 | IC7.EXP 7.94,60.01 8.41,59.53 9.26,59.53 IC7.3
  Bottom 0.254: BNO003.P$2 10.26,48.85 C47.1 | 9.73,71.43 7.94,71.43 7.94,71.44
  other vias: 18.26,41.43 16.99,44.13 5.72,68.26 12.86,58.42 13.97,58.42 8.25,56.67 6.19,54.61 4.13,49.69 4.92,40.8 4.13,45.88 4.29,43.5 10.48,66.36 10.64,58.42 10.64,57.31 6.51,63.66
  pour Bottom: 0,73.98 0,38.42 26.67,38.42 26.67,73.98
  pour Top: 0,73.98 0,38.42 26.67,38.42 26.67,73.98
GND8  (via drill 0.61)
  Top 0.152: 38.58,71.91 39.85,71.91 41.43,71.91
  Top 0.254: LED10.C 48.69,73.03 46.8,71.13 46.8,68.63 | 40.2,68.63 40.32,68.76 42.2,68.76 42.2,70.98 42.75,71.53 | IC9.EXP 38.1,60.01 38.58,59.53 39.42,59.53 IC9.3
  Bottom 0.254: BNO004.P$2 40.42,48.85 C60.1 | 39.9,71.43 38.1,71.43 38.1,71.44
  other vias: 48.42,41.43 47.15,44.13 35.88,68.26 43.02,58.42 44.13,58.42 38.42,56.67 36.35,54.61 34.29,49.69 35.08,40.8 34.29,45.88 34.45,43.5 40.64,66.36 40.8,58.42 40.8,57.31 36.67,63.66
  pour Bottom: 30.16,73.98 30.16,38.42 56.83,38.42 56.83,73.98
  pour Top: 30.16,73.98 30.16,38.42 56.83,38.42 56.83,73.98
GND10  (via drill 0.61)
  Top 0.152: 68.1,71.91 69.37,71.91 70.96,71.91
  Top 0.254: LED12.C 78.22,73.03 76.32,71.13 76.32,68.63 | 69.72,68.63 69.85,68.76 71.72,68.76 71.72,70.98 72.27,71.53 | IC11.EXP 67.63,60.01 68.1,59.53 68.95,59.53 IC11.3
  Bottom 0.254: BNO005.P$2 69.95,48.85 C73.1 | 69.42,71.43 67.63,71.43 67.63,71.44
  other vias: 77.95,41.43 76.68,44.13 65.41,68.26 72.55,58.42 73.66,58.42 67.94,56.67 65.88,54.61 63.82,49.69 64.61,40.8 63.82,45.88 63.98,43.5 70.17,66.36 70.33,58.42 70.33,57.31 66.2,63.66
  pour Bottom: 59.69,73.98 59.69,38.42 86.36,38.42 86.36,73.98
  pour Top: 59.69,73.98 59.69,38.42 86.36,38.42 86.36,73.98
I2C_ADDR_SEL
  Top 0.254: R13.1 2.54,9.37 JP1.4
  Bottom 0.254: BNO055.P$17 2.61,9.43 JP1.4
I2C_ADDR_SEL1
  Top 0.254: R26.1 32.7,9.37 JP3.4
  Bottom 0.254: BNO001.P$17 32.77,9.43 JP3.4
I2C_ADDR_SEL2
  Top 0.254: R39.1 62.23,9.37 JP5.4
  Bottom 0.254: BNO002.P$17 62.3,9.43 JP5.4
I2C_ADDR_SEL3
  Top 0.254: R52.1 2.38,47.78 JP7.4
  Bottom 0.254: BNO003.P$17 2.45,47.85 JP7.4
I2C_ADDR_SEL4
  Top 0.254: R65.1 32.54,47.78 JP9.4
  Bottom 0.254: BNO004.P$17 32.61,47.85 JP9.4
I2C_ADDR_SEL5
  Top 0.254: R78.1 62.07,47.78 JP11.4
  Bottom 0.254: BNO005.P$17 62.14,47.85 JP11.4
I2C_SCL  (via drill 0.33)
  Top 0.152: v5.08,16.51 4.6,16.51 JP1.6 | v5.08,24.92 5.24,26.35 v3.81,27.78
  Bottom 0.152: BNO055.P$19 5.17,13.41 4.6,13.97 JP1.6 | U2.6 5.03,20.27 v5.08,16.51 | 5.22,23.81 5.22,24.91 v5.08,24.92 | v3.81,27.78 R10.2
  Bottom 0.254: 5.22,23.81 5.22,21.85 U2.6
  Bottom 0.406: 5.22,23.81 4.92,23.81
I2C_SCL1  (via drill 0.33)
  Top 0.152: v35.24,16.51 34.77,16.51 JP3.6 | v35.24,24.92 35.4,26.35 v33.97,27.78
  Bottom 0.152: BNO001.P$19 35.33,13.41 34.77,13.97 JP3.6 | U4.6 35.19,20.27 v35.24,16.51 | 35.39,23.81 35.39,24.91 v35.24,24.92 | v33.97,27.78 R23.2
  Bottom 0.254: 35.39,23.81 35.39,21.85 U4.6
  Bottom 0.406: 35.39,23.81 35.08,23.81
I2C_SCL2  (via drill 0.33)
  Top 0.152: v64.77,16.51 64.29,16.51 JP5.6 | v64.77,24.92 64.93,26.35 v63.5,27.78
  Bottom 0.152: BNO002.P$19 64.86,13.41 64.29,13.97 JP5.6 | U7.6 64.72,20.27 v64.77,16.51 | 64.91,23.81 64.91,24.91 v64.77,24.92 | v63.5,27.78 R36.2
  Bottom 0.254: 64.91,23.81 64.91,21.85 U7.6
  Bottom 0.406: 64.91,23.81 64.61,23.81
I2C_SCL3  (via drill 0.33)
  Top 0.152: v4.92,54.93 4.44,54.93 JP7.6 | v4.92,63.34 5.08,64.77 v3.65,66.2
  Bottom 0.152: BNO003.P$19 5.01,51.83 4.44,52.39 JP7.6 | U10.6 4.87,58.69 v4.92,54.93 | 5.06,62.23 5.06,63.33 v4.92,63.34 | v3.65,66.2 R49.2
  Bottom 0.254: 5.06,62.23 5.06,60.27 U10.6
  Bottom 0.406: 5.06,62.23 4.76,62.23
I2C_SCL4  (via drill 0.33)
  Top 0.152: v35.08,54.93 34.61,54.93 JP9.6 | v35.08,63.34 35.24,64.77 v33.81,66.2
  Bottom 0.152: BNO004.P$19 35.17,51.83 34.61,52.39 JP9.6 | U13.6 35.04,58.69 v35.08,54.93 | 35.23,62.23 35.23,63.33 v35.08,63.34 | v33.81,66.2 R62.2
  Bottom 0.254: 35.23,62.23 35.23,60.27 U13.6
  Bottom 0.406: 35.23,62.23 34.92,62.23
I2C_SCL5  (via drill 0.33)
  Top 0.152: v64.61,54.93 64.13,54.93 JP11.6 | v64.61,63.34 64.77,64.77 v63.34,66.2
  Bottom 0.152: BNO005.P$19 64.7,51.83 64.13,52.39 JP11.6 | U16.6 64.56,58.69 v64.61,54.93 | 64.75,62.23 64.75,63.33 v64.61,63.34 | v63.34,66.2 R75.2
  Bottom 0.254: 64.75,62.23 64.75,60.27 U16.6
  Bottom 0.406: 64.75,62.23 64.45,62.23
I2C_SDA
  Bottom 0.152: BNO055.P$20 5.53,14 3.02,16.51 JP1.7 4.29,18.73 4.29,19.21 | 4.29,23.65 4.29,26.35 R9.2
  Bottom 0.254: 4.29,19.21 4.29,23.65 | U2.1 5.83,25.84
  Bottom 0.406: 5.83,25.84 R9.2
I2C_SDA1
  Bottom 0.152: BNO001.P$20 35.69,14 33.18,16.51 JP3.7 34.45,18.73 34.45,19.21 | 34.45,23.65 34.45,26.35 R22.2
  Bottom 0.254: 34.45,19.21 34.45,23.65 | U4.1 35.99,25.84
  Bottom 0.406: 35.99,25.84 R22.2
I2C_SDA2
  Bottom 0.152: BNO002.P$20 65.22,14 62.71,16.51 JP5.7 63.98,18.73 63.98,19.21 | 63.98,23.65 63.98,26.35 R35.2
  Bottom 0.254: 63.98,19.21 63.98,23.65 | U7.1 65.52,25.84
  Bottom 0.406: 65.52,25.84 R35.2
I2C_SDA3
  Bottom 0.152: BNO003.P$20 5.37,52.41 2.86,54.93 JP7.7 4.13,57.15 4.13,57.63 | 4.13,62.07 4.13,64.77 R48.2
  Bottom 0.254: 4.13,57.63 4.13,62.07 | U10.1 5.67,64.26
  Bottom 0.406: 5.67,64.26 R48.2
I2C_SDA4
  Bottom 0.152: BNO004.P$20 35.53,52.41 33.02,54.93 JP9.7 34.29,57.15 34.29,57.63 | 34.29,62.07 34.29,64.77 R61.2
  Bottom 0.254: 34.29,57.63 34.29,62.07 | U13.1 35.83,64.26
  Bottom 0.406: 35.83,64.26 R61.2
I2C_SDA5
  Bottom 0.152: BNO005.P$20 65.06,52.41 62.55,54.93 JP11.7 63.82,57.15 63.82,57.63 | 63.82,62.07 63.82,64.77 R74.2
  Bottom 0.254: 63.82,57.63 63.82,62.07 | U16.1 65.36,64.26
  Bottom 0.406: 65.36,64.26 R74.2
N$1
  Top 0.254: LED1.C 5.22,34.61 R1.1
N$2
  Top 0.254: LED3.C 35.39,34.61 R14.1
N$3
  Bottom 0.254: BNO055.P$4 11.66,9.43 R11.2
N$4
  Top 0.254: LED4.A 51.93,34.61 R15.1
N$5
  Bottom 0.254: BNO001.P$4 41.83,9.43 R24.2
N$6
  Top 0.254: LED2.A 21.76,34.61 R2.1
N$7
  Top 0.254: LED5.C 64.91,34.61 R27.1
N$8
  Top 0.254: LED6.A 81.45,34.61 R28.1
N$9
  Bottom 0.254: BNO002.P$4 71.35,9.43 R37.2
N$10
  Top 0.254: LED7.C 5.06,73.03 R40.1
N$11
  Top 0.254: LED8.A 21.6,73.03 R41.1
N$12
  Bottom 0.254: BNO003.P$4 11.51,47.85 R50.2
N$13
  Top 0.254: LED9.C 35.23,73.03 R53.1
N$14
  Top 0.254: LED10.A 51.77,73.03 R54.1
N$15
  Bottom 0.254: BNO004.P$4 41.67,47.85 R63.2
N$16
  Top 0.254: LED11.C 64.75,73.03 R66.1
N$17
  Top 0.254: LED12.A 81.29,73.03 R67.1
N$18
  Bottom 0.254: BNO005.P$4 71.2,47.85 R76.2
UART0_RX
  Top 0.254: JP2.10 22.7,13.65 22.7,15.56 9.37,15.56 7.64,17.44 IC1.26
UART0_RX1
  Top 0.254: JP4.10 52.86,13.65 52.86,15.56 39.53,15.56 37.81,17.44 IC3.26
UART0_RX2
  Top 0.254: JP6.10 82.39,13.65 82.39,15.56 69.06,15.56 67.33,17.44 IC5.26
UART0_RX3
  Top 0.254: JP8.10 22.54,52.07 22.54,53.98 9.21,53.98 7.48,55.86 IC7.26
UART0_RX4
  Top 0.254: JP10.10 52.7,52.07 52.7,53.98 39.37,53.98 37.65,55.86 IC9.26
UART0_RX5
  Top 0.254: JP12.10 82.23,52.07 82.23,53.98 68.9,53.98 67.17,55.86 IC11.26
UART0_TX  (via drill 0.61)
  Top 0.254: IC1.25 7.14,17.3 9.52,14.76 v20.48,14.76
  Bottom 0.254: v20.48,14.76 24.13,14.76 JP2.9
UART0_TX1  (via drill 0.61)
  Top 0.254: IC3.25 37.31,17.3 39.69,14.76 v50.64,14.76
  Bottom 0.254: v50.64,14.76 54.29,14.76 JP4.9
UART0_TX2  (via drill 0.61)
  Top 0.254: IC5.25 66.83,17.3 69.21,14.76 v80.17,14.76
  Bottom 0.254: v80.17,14.76 83.82,14.76 JP6.9
UART0_TX3  (via drill 0.61)
  Top 0.254: IC7.25 6.98,55.72 9.37,53.18 v20.32,53.18
  Bottom 0.254: v20.32,53.18 23.97,53.18 JP8.9
UART0_TX4  (via drill 0.61)
  Top 0.254: IC9.25 37.15,55.72 39.53,53.18 v50.48,53.18
  Bottom 0.254: v50.48,53.18 54.13,53.18 JP10.9
UART0_TX5  (via drill 0.61)
  Top 0.254: IC11.25 66.67,55.72 69.06,53.18 v80.01,53.18
  Bottom 0.254: v80.01,53.18 83.66,53.18 JP12.9
USB_N
  Top 0.152: 14.14,30.34 14.13,30.34 14.13,29.69
  Top 0.254: 14.14,30.34 14.14,29.21 14.14,27.16 12.93,25.94 12.93,25.08 | 12.93,25.08 12.93,23.4 11.21,21.68 9.52,21.68 | 9.52,21.68 9.37,21.68 | U3.3 13.01,25.16 12.93,25.08 | IC1.4 9.52,21.68
USB_N1
  Top 0.152: 44.31,30.34 44.29,30.34 44.29,29.69
  Top 0.254: 44.31,30.34 44.31,29.21 44.31,27.16 43.09,25.94 43.09,25.08 | 43.09,25.08 43.09,23.4 41.37,21.68 39.69,21.68 | 39.69,21.68 39.53,21.68 | U6.3 43.17,25.16 43.09,25.08 | IC3.4 39.69,21.68
USB_N2
  Top 0.152: 73.83,30.34 73.82,30.34 73.82,29.69
  Top 0.254: 73.83,30.34 73.83,29.21 73.83,27.16 72.62,25.94 72.62,25.08 | 72.62,25.08 72.62,23.4 70.9,21.68 69.21,21.68 | 69.21,21.68 69.06,21.68 | U9.3 72.7,25.16 72.62,25.08 | IC5.4 69.21,21.68
USB_N3
  Top 0.152: 13.98,68.76 13.97,68.76 13.97,68.1
  Top 0.254: 13.98,68.76 13.98,67.63 13.98,65.57 12.77,64.36 12.77,63.5 | 12.77,63.5 12.77,61.82 11.05,60.1 9.37,60.1 | 9.37,60.1 9.21,60.1 | U12.3 12.85,63.58 12.77,63.5 | IC7.4 9.37,60.1
USB_N4
  Top 0.152: 44.15,68.76 44.13,68.76 44.13,68.1
  Top 0.254: 44.15,68.76 44.15,67.63 44.15,65.57 42.93,64.36 42.93,63.5 | 42.93,63.5 42.93,61.82 41.21,60.1 39.53,60.1 | 39.53,60.1 39.37,60.1 | U15.3 43.01,63.58 42.93,63.5 | IC9.4 39.53,60.1
USB_N5
  Top 0.152: 73.67,68.76 73.66,68.76 73.66,68.1
  Top 0.254: 73.67,68.76 73.67,67.63 73.67,65.57 72.46,64.36 72.46,63.5 | 72.46,63.5 72.46,61.82 70.74,60.1 69.06,60.1 | 69.06,60.1 68.9,60.1 | U18.3 72.54,63.58 72.46,63.5 | IC11.4 69.06,60.1
USB_P
  Top 0.254: 13.49,30.34 13.49,29.05 13.49,27.78 | 13.49,27.78 13.49,27.15 12.31,26.13 12.31,23.75 11.02,22.14 9.37,22.14 9.41,22.09 IC1.5 | U3.2 13.41,27.86 13.49,27.78
USB_P1
  Top 0.254: 43.66,30.34 43.66,29.05 43.66,27.78 | 43.66,27.78 43.66,27.15 42.47,26.13 42.47,23.75 41.18,22.14 39.53,22.14 39.57,22.09 IC3.5 | U6.2 43.58,27.86 43.66,27.78
USB_P2
  Top 0.254: 73.18,30.34 73.18,29.05 73.18,27.78 | 73.18,27.78 73.18,27.15 72,26.13 72,23.75 70.71,22.14 69.06,22.14 69.1,22.09 IC5.5 | U9.2 73.1,27.86 73.18,27.78
USB_P3
  Top 0.254: 13.33,68.76 13.33,67.47 13.33,66.2 | 13.33,66.2 13.33,65.57 12.15,64.55 12.15,62.17 10.86,60.55 9.21,60.55 9.25,60.51 IC7.5 | U12.2 13.25,66.28 13.33,66.2
USB_P4
  Top 0.254: 43.5,68.76 43.5,67.47 43.5,66.2 | 43.5,66.2 43.5,65.57 42.32,64.55 42.32,62.17 41.02,60.55 39.37,60.55 39.42,60.51 IC9.5 | U15.2 43.42,66.28 43.5,66.2
USB_P5
  Top 0.254: 73.02,68.76 73.02,67.47 73.02,66.2 | 73.02,66.2 73.02,65.57 71.84,64.55 71.84,62.17 70.55,60.55 68.9,60.55 68.94,60.51 IC11.5 | U18.2 72.94,66.28 73.02,66.2
VBAT1  (via drill 0.61)
  Top 0.254: U1.3 17.78,26.2 v18.57,26.99 | R5.2 20.02,3.81 13.81,3.81 12.49,5.13 CN3.2 12.49,9.65 C3.1 12.84,11.1 13.49,11.75 16.5,11.75 IC2.1 16.58,13.72 v16.67,13.81
  Bottom 0.254: JP2.1 18.57,27.94 v18.57,26.99 16.67,25.08 v16.67,13.81
VBAT2  (via drill 0.61)
  Top 0.254: U5.3 47.94,26.2 v48.74,26.99 | R18.2 50.18,3.81 43.97,3.81 42.66,5.13 CN1.2 42.66,9.65 C16.1 43.01,11.1 43.66,11.75 46.67,11.75 IC4.1 46.74,13.72 v46.83,13.81
  Bottom 0.254: JP4.1 48.74,27.94 v48.74,26.99 46.83,25.08 v46.83,13.81
VBAT3  (via drill 0.61)
  Top 0.254: U8.3 77.47,26.2 v78.26,26.99 | R31.2 79.71,3.81 73.5,3.81 72.18,5.13 CN2.2 72.18,9.65 C29.1 72.53,11.1 73.18,11.75 76.19,11.75 IC6.1 76.27,13.72 v76.36,13.81
  Bottom 0.254: JP6.1 78.26,27.94 v78.26,26.99 76.36,25.08 v76.36,13.81
VBAT4  (via drill 0.61)
  Top 0.254: U11.3 17.62,64.61 v18.41,65.41 | R44.2 19.86,42.23 13.65,42.23 12.33,43.55 CN4.2 12.33,48.07 C42.1 12.68,49.52 13.33,50.16 16.34,50.16 IC8.1 16.42,52.14 v16.51,52.23
  Bottom 0.254: JP8.1 18.41,66.36 v18.41,65.41 16.51,63.5 v16.51,52.23
VBAT5  (via drill 0.61)
  Top 0.254: U14.3 47.79,64.61 v48.58,65.41 | R57.2 50.02,42.23 43.81,42.23 42.5,43.55 CN5.2 42.5,48.07 C55.1 42.85,49.52 43.5,50.16 46.51,50.16 IC10.1 46.58,52.14 v46.67,52.23
  Bottom 0.254: JP10.1 48.58,66.36 v48.58,65.41 46.67,63.5 v46.67,52.23
VBAT6  (via drill 0.61)
  Top 0.254: U17.3 77.31,64.61 v78.1,65.41 | R70.2 79.55,42.23 73.34,42.23 72.02,43.55 CN6.2 72.02,48.07 C68.1 72.37,49.52 73.02,50.16 76.03,50.16 IC12.1 76.11,52.14 v76.2,52.23
  Bottom 0.254: JP12.1 78.1,66.36 v78.1,65.41 76.2,63.5 v76.2,52.23
VDD_3V1  (via drill 0.61)
  Top 0.254: IC4.3 51.29,11.75 C20.1 51.29,7.63 v51.28,7.62 | v41.59,13.34 38.11,10.49 R25.1 37.45,9.37 R26.2
  Bottom 0.254: R23.1 R22.1 37.8,26.18 38.73,25.24 38.73,22.54 39.53,21.75 42.07,21.75 42.07,18.08 41.12,17.28 | C21.2 41.38,9.93 BNO001.P$3 42.15,10.09 R24.1 | R24.1 C26.1 C25.1 42.88,16.03 41.75,16.03 41.59,15.24 | 41.59,15.24 v41.59,13.34 40.8,12.54 39.69,12.54 BNO001.P$28 | 41.59,15.24 41.12,17.28 | 41.12,17.28 37.22,21.02 | 37.22,21.02 U4.5 | C14.1 36.19,19.68 37.22,21.02 | v51.28,7.62 44.62,7.62 R24.1
VDD_3V2  (via drill 0.61)
  Top 0.254: IC6.3 80.82,11.75 C33.1 80.82,7.63 v80.8,7.62 | v71.12,13.34 67.64,10.49 R38.1 66.98,9.37 R39.2
  Bottom 0.254: R36.1 R35.1 67.32,26.18 68.26,25.24 68.26,22.54 69.06,21.75 71.6,21.75 71.6,18.08 70.64,17.28 | C34.2 70.91,9.93 BNO002.P$3 71.68,10.09 R37.1 | R37.1 C39.1 C38.1 72.4,16.03 71.28,16.03 71.12,15.24 | 71.12,15.24 v71.12,13.34 70.33,12.54 69.21,12.54 BNO002.P$28 | 71.12,15.24 70.64,17.28 | 70.64,17.28 66.74,21.02 | 66.74,21.02 U7.5 | C27.1 65.72,19.68 66.74,21.02 | v80.8,7.62 74.15,7.62 R37.1
VDD_3V3  (via drill 0.61)
  Top 0.254: IC2.3 21.13,11.75 C7.1 21.13,7.63 v21.11,7.62 | v11.43,13.34 7.95,10.49 R12.1 7.29,9.37 R13.2
  Bottom 0.254: R10.1 R9.1 7.63,26.18 8.57,25.24 8.57,22.54 9.37,21.75 11.91,21.75 11.91,18.08 10.95,17.28 | C8.2 11.22,9.93 BNO055.P$3 11.99,10.09 R11.1 | R11.1 C13.1 C12.1 12.71,16.03 11.59,16.03 11.43,15.24 | 11.43,15.24 v11.43,13.34 10.64,12.54 9.52,12.54 BNO055.P$28 | 11.43,15.24 10.95,17.28 | 10.95,17.28 7.05,21.02 | 7.05,21.02 U2.5 | C1.1 6.03,19.68 7.05,21.02 | v21.11,7.62 14.46,7.62 R11.1
VDD_3V4  (via drill 0.61)
  Top 0.254: IC8.3 20.97,50.17 C46.1 20.97,46.05 v20.95,46.04 | v11.27,51.75 7.79,48.91 R51.1 7.13,47.78 R52.2
  Bottom 0.254: R49.1 R48.1 7.48,64.6 8.41,63.66 8.41,60.96 9.21,60.17 11.75,60.17 11.75,56.49 10.79,55.7 | C47.2 11.06,48.35 BNO003.P$3 11.83,48.51 R50.1 | R50.1 C52.1 C51.1 12.56,54.45 11.43,54.45 11.27,53.66 | 11.27,53.66 v11.27,51.75 10.48,50.96 9.37,50.96 BNO003.P$28 | 11.27,53.66 10.79,55.7 | 10.79,55.7 6.89,59.44 | 6.89,59.44 U10.5 | C40.1 5.87,58.1 6.89,59.44 | v20.95,46.04 14.3,46.04 R50.1
VDD_3V5  (via drill 0.61)
  Top 0.254: IC10.3 51.13,50.17 C59.1 51.13,46.05 v51.12,46.04 | v41.43,51.75 37.96,48.91 R64.1 37.29,47.78 R65.2
  Bottom 0.254: R62.1 R61.1 37.64,64.6 38.58,63.66 38.58,60.96 39.37,60.17 41.91,60.17 41.91,56.49 40.96,55.7 | C60.2 41.22,48.35 BNO004.P$3 41.99,48.51 R63.1 | R63.1 C65.1 C64.1 42.72,54.45 41.59,54.45 41.43,53.66 | 41.43,53.66 v41.43,51.75 40.64,50.96 39.53,50.96 BNO004.P$28 | 41.43,53.66 40.96,55.7 | 40.96,55.7 37.06,59.44 | 37.06,59.44 U13.5 | C53.1 36.04,58.1 37.06,59.44 | v51.12,46.04 44.46,46.04 R63.1
VDD_3V6  (via drill 0.61)
  Top 0.254: IC12.3 80.66,50.17 C72.1 80.66,46.05 v80.64,46.04 | v70.96,51.75 67.48,48.91 R77.1 66.82,47.78 R78.2
  Bottom 0.254: R75.1 R74.1 67.17,64.6 68.1,63.66 68.1,60.96 68.9,60.17 71.44,60.17 71.44,56.49 70.48,55.7 | C73.2 70.75,48.35 BNO005.P$3 71.52,48.51 R76.1 | R76.1 C78.1 C77.1 72.25,54.45 71.12,54.45 70.96,53.66 | 70.96,53.66 v70.96,51.75 70.17,50.96 69.06,50.96 BNO005.P$28 | 70.96,53.66 70.48,55.7 | 70.48,55.7 66.58,59.44 | 66.58,59.44 U16.5 | C66.1 65.56,58.1 66.58,59.44 | v80.64,46.04 73.99,46.04 R76.1
VDD_CP1  (via drill 0.61)
  Top 0.254: C19.2 R17.2 39.04,28.1 v39.37,28.1 | IC3.6 40.21,22.59 v40.64,23.02
  Bottom 0.254: v40.64,23.02 39.37,24.29 v39.37,28.1
VDD_CP2  (via drill 0.61)
  Top 0.254: C32.2 R30.2 68.56,28.1 v68.9,28.1 | IC5.6 69.74,22.59 v70.17,23.02
  Bottom 0.254: v70.17,23.02 68.9,24.29 v68.9,28.1
VDD_CP3  (via drill 0.61)
  Top 0.254: C45.2 R43.2 8.72,66.52 v9.05,66.52 | IC7.6 9.89,61.01 v10.32,61.44
  Bottom 0.254: v10.32,61.44 9.05,62.71 v9.05,66.52
VDD_CP4  (via drill 0.61)
  Top 0.254: C58.2 R56.2 38.88,66.52 v39.21,66.52 | IC9.6 40.05,61.01 v40.48,61.44
  Bottom 0.254: v40.48,61.44 39.21,62.71 v39.21,66.52
VDD_CP5  (via drill 0.61)
  Top 0.254: C71.2 R69.2 68.41,66.52 v68.74,66.52 | IC11.6 69.58,61.01 v70.01,61.44
  Bottom 0.254: v70.01,61.44 68.74,62.71 v68.74,66.52
VDD_CP2102  (via drill 0.61)
  Top 0.254: C6.2 R4.2 8.87,28.1 v9.21,28.1 | IC1.6 10.05,22.59 v10.48,23.02
  Bottom 0.254: v10.48,23.02 9.21,24.29 v9.21,28.1
VDD_USB  (via drill 0.61)
  Top 0.152: v15.24,29.37 14.79,29.37 U$13.VBUS1
  Top 0.254: C4.1 C5.1 8.64,24.82 IC1.8 IC1.7 | U1.4 16.67,22.2 C2.1 15.63,25.7 U3.4 v15.09,23.34 v15.08,23.34 | v10.79,24.45 C4.1 | LED1.A 6.92,34.19 7.3,33.81 7.3,30.32 8.73,28.89 11.27,28.89 11.91,28.26 11.91,26.66 C4.1
  Bottom 0.254: v10.79,24.45 11.91,23.34 v15.08,23.34 15.24,23.5 v15.24,29.37
VDD_USB1  (via drill 0.61)
  Top 0.152: v45.4,29.37 44.96,29.37 U$1.VBUS1
  Top 0.254: C17.1 C18.1 38.81,24.82 IC3.8 IC3.7 | U5.4 46.83,22.2 C15.1 45.79,25.7 U6.4 v45.25,23.34 v45.24,23.34 | v40.96,24.45 C17.1 | LED3.A 37.09,34.19 37.46,33.81 37.46,30.32 38.89,28.89 41.43,28.89 42.07,28.26 42.07,26.66 C17.1
  Bottom 0.254: v40.96,24.45 42.07,23.34 v45.24,23.34 45.4,23.5 v45.4,29.37
VDD_USB2  (via drill 0.61)
  Top 0.152: v74.93,29.37 74.48,29.37 U$2.VBUS1
  Top 0.254: C30.1 C31.1 68.33,24.82 IC5.8 IC5.7 | U8.4 76.36,22.2 C28.1 75.32,25.7 U9.4 v74.78,23.34 v74.77,23.34 | v70.48,24.45 C30.1 | LED5.A 66.61,34.19 66.99,33.81 66.99,30.32 68.42,28.89 70.96,28.89 71.6,28.26 71.6,26.66 C30.1
  Bottom 0.254: v70.48,24.45 71.6,23.34 v74.77,23.34 74.93,23.5 v74.93,29.37
VDD_USB3  (via drill 0.61)
  Top 0.152: v15.08,67.79 14.63,67.79 U$3.VBUS1
  Top 0.254: C43.1 C44.1 8.48,63.24 IC7.8 IC7.7 | U11.4 16.51,60.62 C41.1 15.47,64.12 U12.4 14.93,61.76 v14.92,61.75 | v10.64,62.87 C43.1 | LED7.A 6.76,72.61 7.14,72.23 7.14,68.74 8.57,67.31 11.11,67.31 11.75,66.67 11.75,65.07 C43.1
  Bottom 0.254: v10.64,62.87 11.75,61.75 v14.92,61.75 15.08,61.91 v15.08,67.79
VDD_USB4  (via drill 0.61)
  Top 0.152: v45.24,67.79 44.8,67.79 U$4.VBUS1
  Top 0.254: C56.1 C57.1 38.65,63.24 IC9.8 IC9.7 | U14.4 46.67,60.62 C54.1 45.63,64.12 U15.4 45.09,61.76 v45.08,61.75 | v40.8,62.87 C56.1 | LED9.A 36.93,72.61 37.31,72.23 37.31,68.74 38.73,67.31 41.27,67.31 41.91,66.67 41.91,65.07 C56.1
  Bottom 0.254: v40.8,62.87 41.91,61.75 v45.08,61.75 45.24,61.91 v45.24,67.79
VDD_USB5  (via drill 0.61)
  Top 0.152: v74.77,67.79 74.32,67.79 U$5.VBUS1
  Top 0.254: C69.1 C70.1 68.17,63.24 IC11.8 IC11.7 | U17.4 76.2,60.62 C67.1 75.16,64.12 U18.4 74.62,61.76 v74.61,61.75 | v70.33,62.87 C69.1 | LED11.A 66.45,72.61 66.83,72.23 66.83,68.74 68.26,67.31 70.8,67.31 71.44,66.67 71.44,65.07 C69.1
  Bottom 0.254: v70.33,62.87 71.44,61.75 v74.61,61.75 74.77,61.91 v74.77,67.79
X_IN
  Bottom 0.152: BNO055.P$27 9.03,13.48 XTAL1.1 C11.2
  Bottom 0.254: 9.21,13.97 XTAL1.1
X_IN1
  Bottom 0.152: BNO001.P$27 39.19,13.48 XTAL2.1 C24.2
  Bottom 0.254: 39.37,13.97 XTAL2.1
X_IN2
  Bottom 0.152: BNO002.P$27 68.72,13.48 XTAL3.1 C37.2
  Bottom 0.254: 68.9,13.97 XTAL3.1
X_IN3
  Bottom 0.152: BNO003.P$27 8.87,51.89 XTAL4.1 C50.2
  Bottom 0.254: 9.05,52.39 XTAL4.1
X_IN4
  Bottom 0.152: BNO004.P$27 39.03,51.89 XTAL5.1 C63.2
  Bottom 0.254: 39.21,52.39 XTAL5.1
X_IN5
  Bottom 0.152: BNO005.P$27 68.56,51.89 XTAL6.1 C76.2
  Bottom 0.254: 68.74,52.39 XTAL6.1
X_OUT
  Bottom 0.152: BNO055.P$26 8.53,13.06 XTAL1.2 C10.2
  Bottom 0.254: 7.3,13.97 XTAL1.2
X_OUT1
  Bottom 0.152: BNO001.P$26 38.69,13.06 XTAL2.2 C23.2
  Bottom 0.254: 37.46,13.97 XTAL2.2
X_OUT2
  Bottom 0.152: BNO002.P$26 68.22,13.06 XTAL3.2 C36.2
  Bottom 0.254: 66.99,13.97 XTAL3.2
X_OUT3
  Bottom 0.152: BNO003.P$26 8.37,51.48 XTAL4.2 C49.2
  Bottom 0.254: 7.14,52.39 XTAL4.2
X_OUT4
  Bottom 0.152: BNO004.P$26 38.53,51.48 XTAL5.2 C62.2
  Bottom 0.254: 37.31,52.39 XTAL5.2
X_OUT5
  Bottom 0.152: BNO005.P$26 68.06,51.48 XTAL6.2 C75.2
  Bottom 0.254: 66.83,52.39 XTAL6.2